# Altium PCB Placa Principal.PcbDoc
Units mil, origin at the board's own origin, x right, y up, seen from the top; angles counter-clockwise.
Board outline 3870 x 2300 mil, 2 copper layers (Top Layer, Bottom Layer); 21 components, 15 nets, 105 pads, 23 vias.
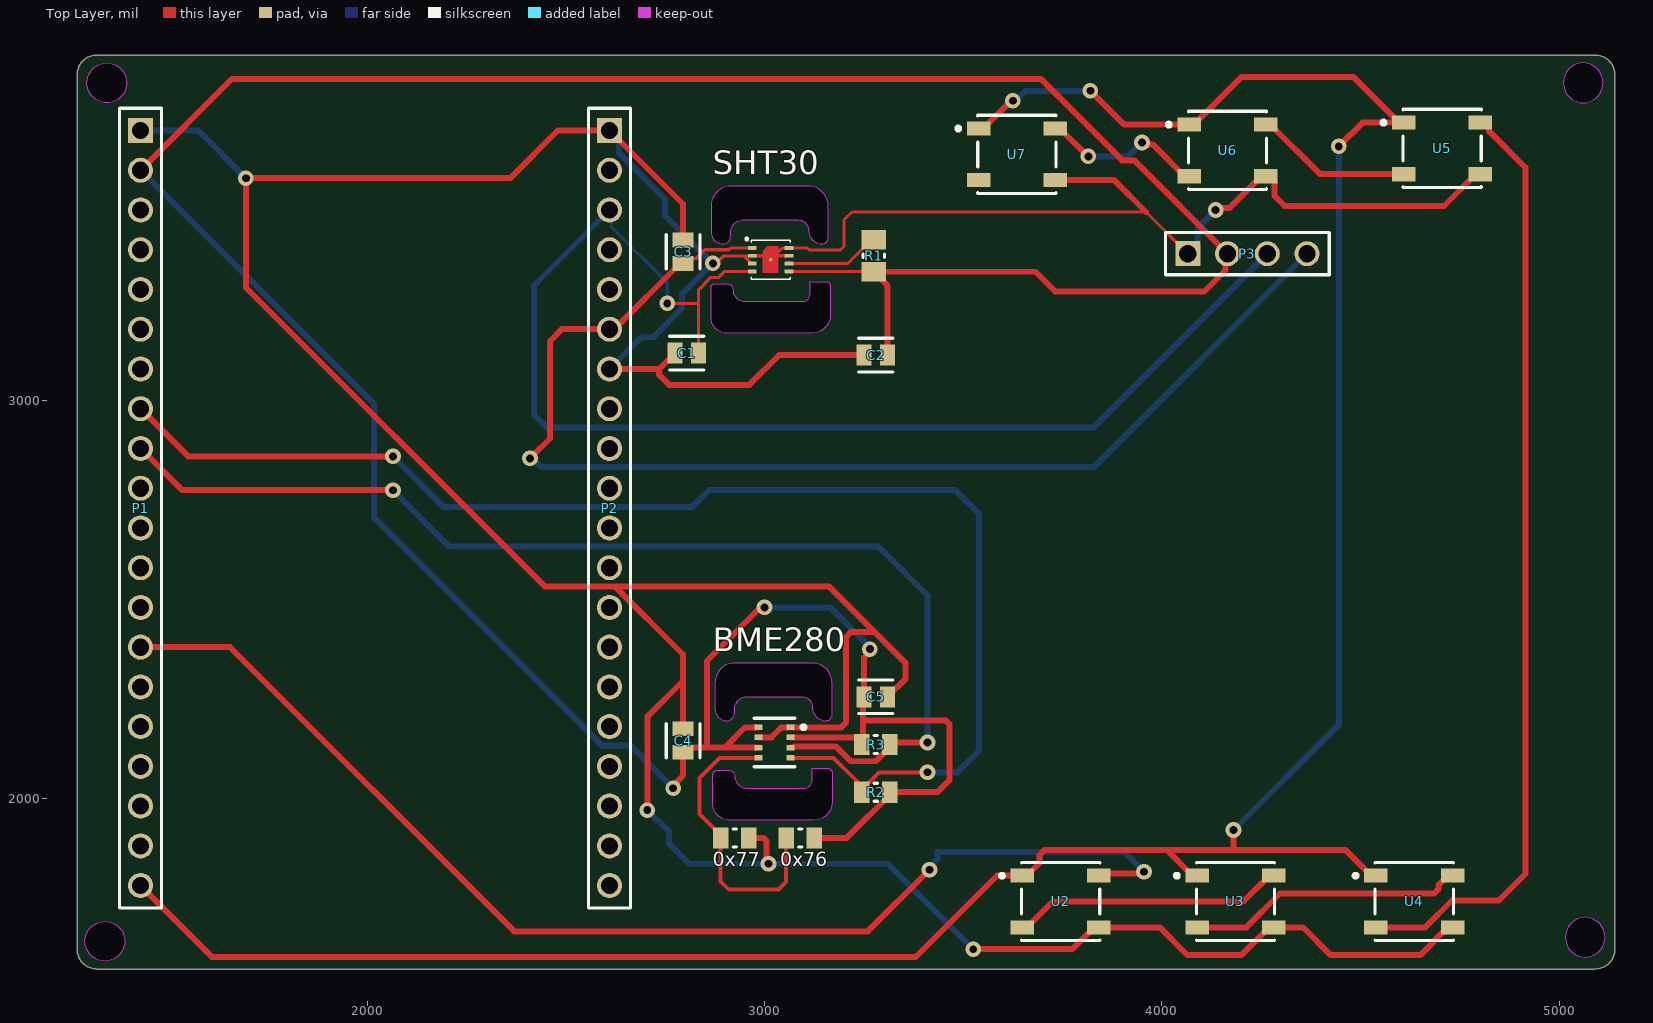
[diagram p0: Top Layer view]
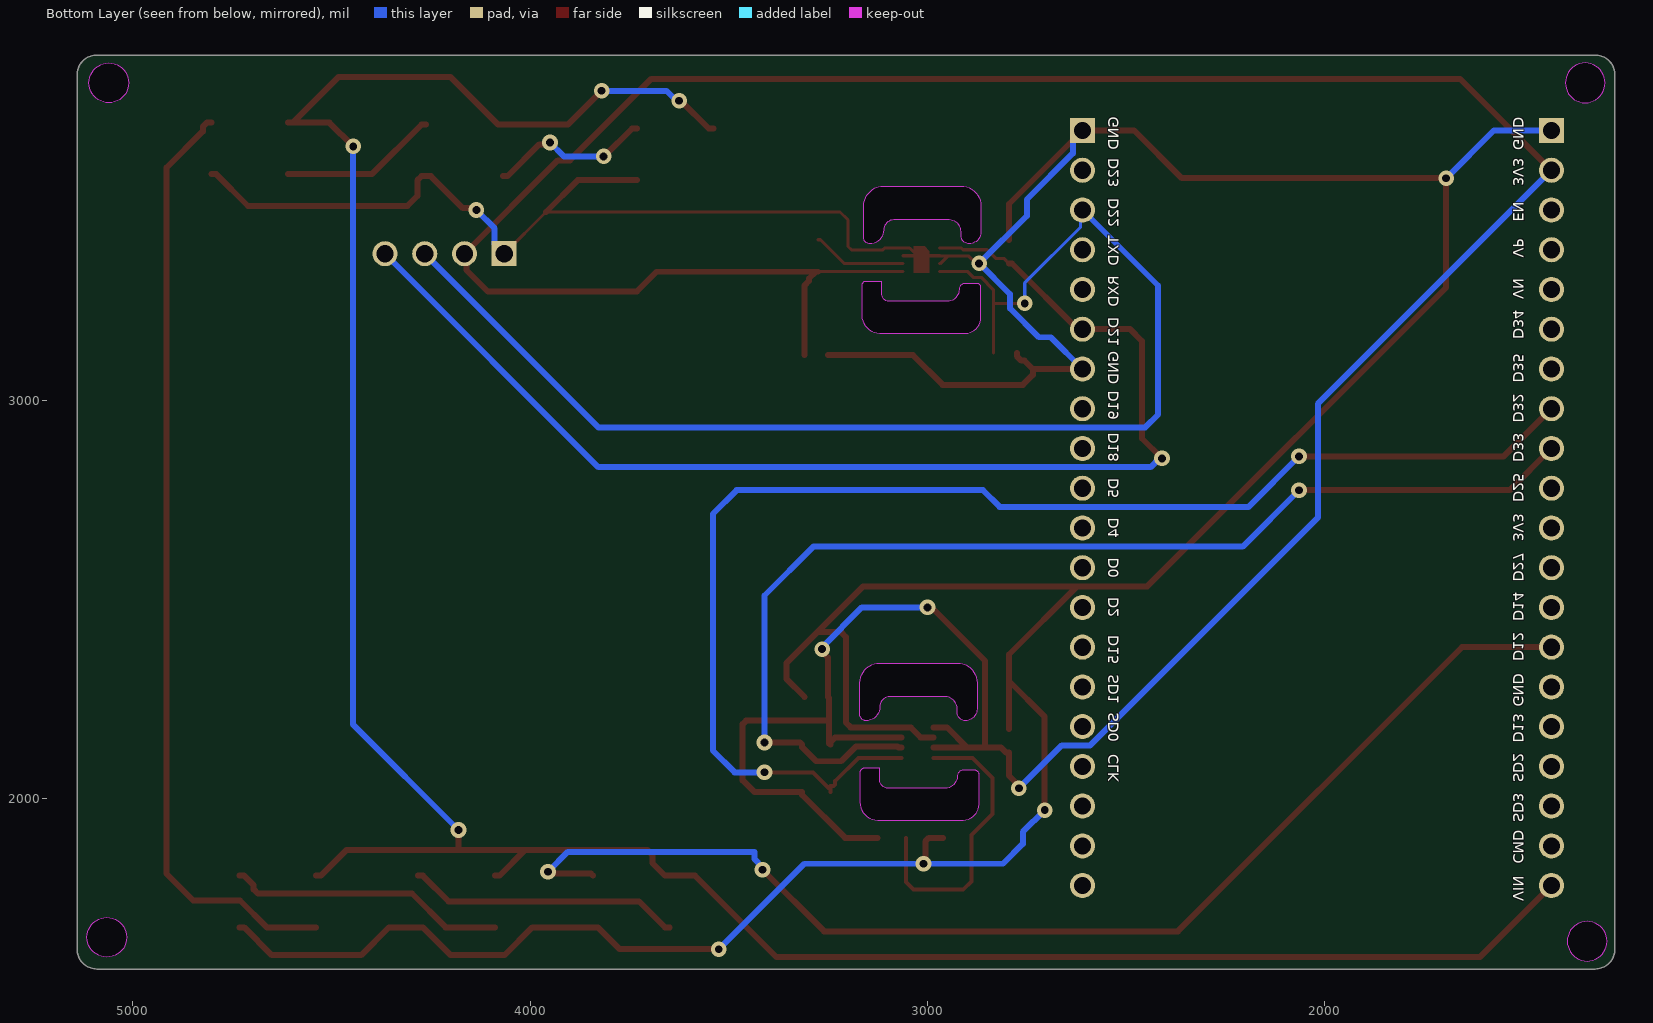
[diagram p1: Bottom Layer view, seen from below]
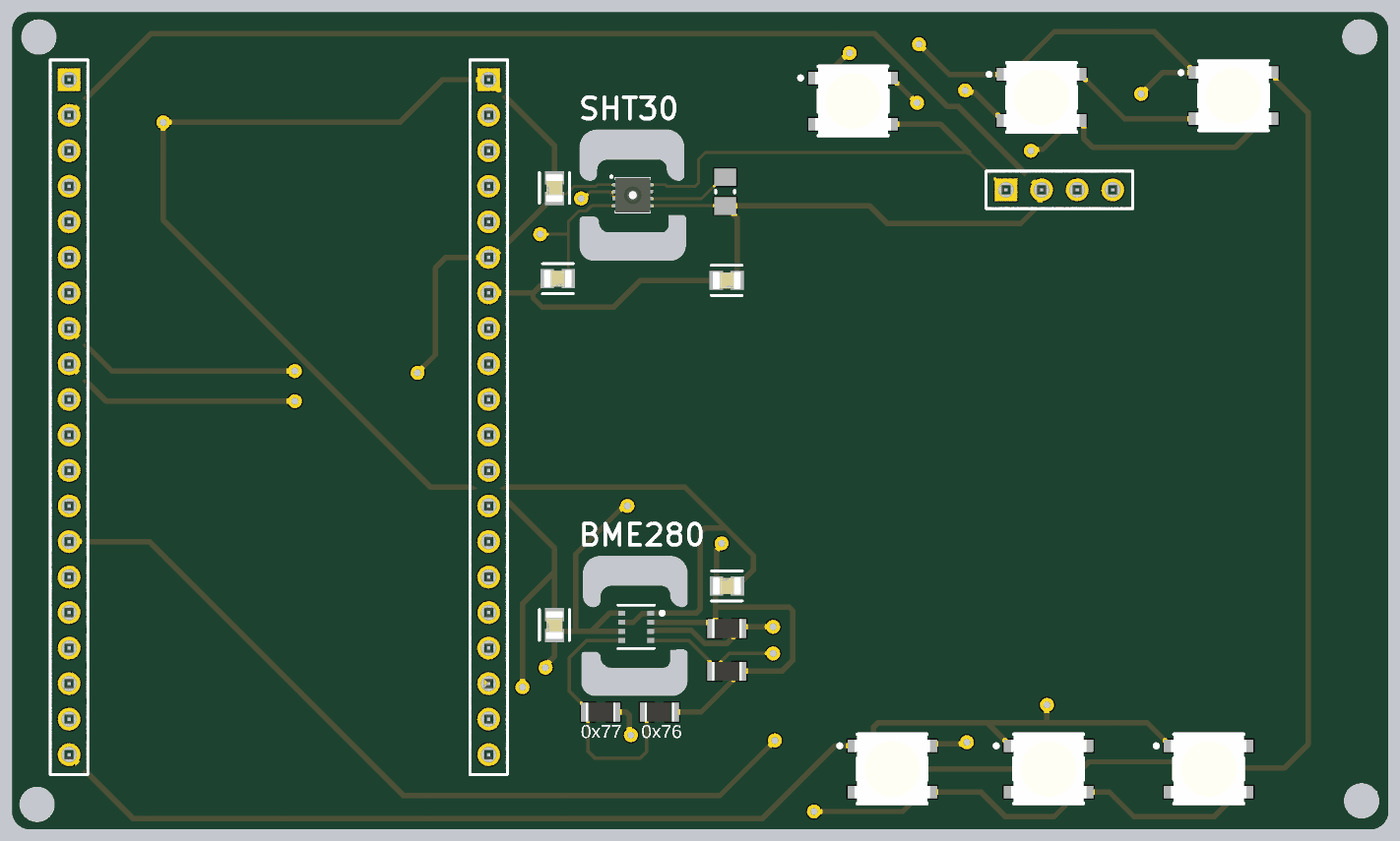
[diagram p2: 3D render of the assembled board from above, using the file's embedded part models]

## Layer stack, top to bottom
Top Solder: solder mask 0.4, Solder Resist, Dk 3.5
Top Layer: signal copper 1.4
Dielectric 1: dielectric 12.6, FR-4, Dk 4.8
Bottom Layer: signal copper 1.4
Bottom Solder: solder mask 0.4, Solder Resist, Dk 3.5

## Board outline
1270,1620 1270,3820 cw(c1320,3820) 1320,3870 5090,3870 cw(c5090,3820) 5140,3820 5140,1620 cw(c5090,1620) 5090,1570 1320,1570 cw(c1320,1620)
cut-out: 2875,2225 ccw(c2905,2225) 2905,2195 ccw(c2905,2215) 2925,2215 2925,2225 cw(c2955,2225) 2955,2255 3095,2255 cw(c3095,2230) 3120,2230 ccw(c3155,2230) 3155,2195 ccw(c3155,2210) 3170,2210 3170,2290 ccw(c3120,2290) 3120,2340 2925,2340 ccw(c2925,2290) 2875,2290
cut-out: 2870,1985 2870,2060 cw(c2880,2060) 2880,2070 2910,2070 cw(c2910,2055) 2925,2055 ccw(c2955,2055) 2955,2025 3100,2025 ccw(c3100,2045) 3120,2045 3120,2075 3160,2075 cw(c3160,2065) 3170,2065 3170,1990 cw(c3125,1990) 3125,1945 2910,1945 cw(c2910,1985)
cut-out: 1345,3750 cw(c1345,3800) 1295,3800 cw(c1345,3800) 1345,3850 cw(c1345,3800) 1395,3800 cw(c1345,3800)
cut-out: 1340,1590 cw(c1340,1640) 1290,1640 cw(c1340,1640) 1340,1690 cw(c1340,1640) 1390,1640 cw(c1340,1640)
cut-out: 5015,1650 ccw(c5065,1650) 5065,1600 ccw(c5065,1650) 5115,1650 ccw(c5065,1650) 5065,1700 ccw(c5065,1650)
cut-out: 5010,3800 ccw(c5060,3800) 5060,3750 ccw(c5060,3800) 5110,3800 ccw(c5060,3800) 5060,3850 ccw(c5060,3800)
cut-out: 2865.32,3425 ccw(c2895.32,3425) 2895.32,3395 ccw(c2895.32,3415) 2915.32,3415 2915.32,3425 cw(c2945.32,3425) 2945.32,3455 3085.32,3455 cw(c3085.32,3430) 3110.32,3430 ccw(c3145.32,3430) 3145.32,3395 ccw(c3145.32,3410) 3160.32,3410 3160.32,3490 ccw(c3110.32,3490) 3110.32,3540 2915.32,3540 ccw(c2915.32,3490) 2865.32,3490
cut-out: 2865.32,3210 2865.32,3285 cw(c2875.32,3285) 2875.32,3295 2905.32,3295 cw(c2905.32,3280) 2920.32,3280 ccw(c2950.32,3280) 2950.32,3250 3095.32,3250 ccw(c3095.32,3270) 3115.32,3270 3115.32,3300 3155.32,3300 cw(c3155.32,3290) 3165.32,3290 3165.32,3215 cw(c3120.32,3215) 3120.32,3170 2905.32,3170 cw(c2905.32,3210)

## Design rules (kind name [scope] priority, off if disabled: settings)
BoardOutlineClearance [All] p1: gap=7.87 ignorepadtopadclearanceinfootprint=FALSE except(15.75: Arc-SplitBarrior Arc-SplitContinuation Track-SplitBarrior Track-SplitContinuation SMDPad-SplitBarrior SMDPad-SplitContinuation THPad-SplitBarrior THPad-SplitContinuation Via-SplitBarrior Via-SplitContinuation Fill-SplitBarrior Fill-SplitContinuation Poly-SplitBarrior Poly-SplitContinuation Region-SplitBarrior Region-SplitContinuation Text-SplitBarrior Text-SplitContinuation)
Clearance "Clearance Bottom Layer" [OnLayer('Bottom Layer')] p1: gap=8 ignorepadtopadclearanceinfootprint=TRUE except(10: Arc-Text Track-Text SMDPad-Text THPad-Text Via-Text Fill-Text Poly-Text Region-Text Text-Text)
Clearance "Clearance Top Layer" [OnLayer('Top Layer')] p2: gap=8 ignorepadtopadclearanceinfootprint=TRUE except(10: Arc-Text Track-Text SMDPad-Text THPad-Text Via-Text Fill-Text Poly-Text Region-Text Text-Text)
Clearance [All] p3: gap=7.87 ignorepadtopadclearanceinfootprint=FALSE except(3.5: Arc-Arc Arc-Track Arc-SMDPad Track-Track Track-SMDPad SMDPad-SMDPad; 5: Arc-Via Track-Via SMDPad-Via THPad-Via Via-Via; 10: Arc-Text Track-Text SMDPad-Text THPad-Text Via-Text Fill-Text Poly-Text Region-Text Text-Text)
HoleSize [All] p1: absolutevalues=TRUE maxlimit=248.03 minlimit=7.87 maxpercent=80.000 minpercent=20.000
MinimumAnnularRing [All] p1: minimumring=3
MinimumSolderMaskSliver [All] p1: minsoldermaskwidth=3.94
PolygonConnect PolygonConnect_1 [All] p1: thpad.connectstyle=Relief thpad.reliefconductorwidth=20 thpad.reliefentries=4 thpad.polygonreliefangle="90 Angle" thpad.airgapwidth=10 smdpad.connectstyle=Relief smdpad.reliefconductorwidth=20 smdpad.reliefentries=4 smdpad.polygonreliefangle="90 Angle" smdpad.airgapwidth=10 via.connectstyle=Direct via.reliefconductorwidth=20 via.reliefentries=4 via.polygonreliefangle="90 Angle" via.airgapwidth=10
RoutingCorners [All] p1: cornerstyle=Round minsetback=100 maxsetback=100
RoutingVias [All] p1: holewidth=19.68 width=39.37 viastyle="Through Hole" minholewidth=7.87 minwidth=17.72 maxholewidth=39.37 maxwidth=78.74
SilkToSilkClearance [All] p1: silktosilkclearance=3.94
SilkToSolderMaskClearance [IsPad] p1: minsilkscreentomaskgap=3.94 clearancetoexposedcopper=TRUE
SolderMaskExpansion [All] p1: expansion=4 istentingtop=FALSE
Width [All] p1: maxlimit=100 minlimit=3.5 preferedwidth=15
25 further rules are at their usual default settings.

## Components (designator, comment, footprint, x,y, rotation, side; value= is the part's Value field where it differs from the comment)
0x76 "0x76" RESC2013X60X35NL10T20 3090,1900 r0 top (schematic designator R4)
0x77 "0x77" RESC2013X60X35NL10T20 2925,1900 r180 top (schematic designator R5)
BME280 "BME280" FP-BME280-MFG 3025,2140 r0 top (schematic designator U1)
C1 "0.1nF" FP-C0805C-DN-MFG 2804.53,3120 r180 top value="0.10 μF"
C2 "100nF" FP-C0805C-DN-MFG 3279.53,3115 r180 top value="0.10 μF"
C3 "0.1nF" FP-C0805C-DN-MFG 2795,3375 r90 top value="0.10 μF"
C4 "100nF" FP-C0805C-DN-MFG 2795,2145 r90 top value="0.10 μF"
C5 "100nF" FP-C0805C-DN-MFG 3280,2255 r0 top value="0.10 μF"
P1 "61302011121" 61302011121 1430,2730 r270 top
P2 "61302011121" 61302011121 2610,2730 r270 top
P3 "61300411121" 61300411121 4215,3370 r0 top
R1 "2K" RESC2013X50X30ML20T20 3275,3365 r90 top
R2 "10k" RESC2013X60X35NL10T20 3280,2015 r0 top
R3 "10k" RESC2013X60X35NL10T20 3280,2135 r180 top
SHT30 "SHT3x-ARx" SHT3x 3015.32,3355 r0 top (schematic designator Sen1)
U2 "1655" ADA-RGB-1655_V 3745,1740 r0 top
U3 "1655" ADA-RGB-1655_V 4185,1740 r0 top
U4 "1655" ADA-RGB-1655_V 4635,1740 r0 top
U5 "1655" ADA-RGB-1655_V 4705,3635 r0 top
U6 "1655" ADA-RGB-1655_V 4165,3630 r0 top
U7 "1655" ADA-RGB-1655_V 3635,3620 r0 top

## Footprints (in the part's own frame and the unit in brackets; to place one, negate y for a bottom-side part, rotate by r counter-clockwise, add the part's x,y. Pads: shape width x height; smd on the part's side, far side on the other; paste and mask are expansions set on the pad)
61300411121 [mm] "Pin Header, pitch 2.54 mm, THT, Vertical, single row, 4p"
  rect 1.6x1.6 hole 1.1: 1(-3.81,0)
  round 1.6 hole 1.1: 2(-1.27,0) 3(1.27,0) 4(3.81,0)
  silkscreen extent -5.23,-1.35 5.23,1.35, body extent -5.08,-1.27 5.08,1.27, height 8.57
61302011121 [mm] "Pin Header, pitch 2.54 mm, THT, Vertical, single row, 20p"
  rect 1.6x1.6 hole 1.1: 1(-24.13,0)
  round 1.6 hole 1.1: 2(-21.59,0) 3(-19.05,0) 4(-16.51,0) 5(-13.97,0) 6(-11.43,0) 7(-8.89,0) 8(-6.35,0) 9(-3.81,0) 10(-1.27,0) 11(1.27,0) 12(3.81,0) 13(6.35,0) 14(8.89,0) 15(11.43,0) 16(13.97,0) 17(16.51,0) 18(19.05,0) 19(21.59,0) 20(24.13,0)
  silkscreen extent -25.55,-1.35 25.55,1.35, body extent -25.4,-1.27 25.4,1.27, height 8.57
ADA-RGB-1655_V [mm] "SMD, 4-Leads, Body 5x5mm"
  rect 1.5x0.9 smd: 1(-2.45,1.65) 2(-2.45,-1.65) 3(2.45,-1.65) 4(2.45,1.65)
  silkscreen extent -3.87,-2.5 2.5,2.5, body extent -2.7,-2.5 2.7,2.5, height 1.68
FP-BME280-MFG [mm]
  rect 0.5x0.35 smd paste+0 mask+0: 1(1.025,0.975) 2(1.025,0.325) 3(1.025,-0.325) 4(1.025,-0.975) 5(-1.025,-0.975) 6(-1.025,-0.325) 7(-1.025,0.325) 8(-1.025,0.975)
  silkscreen extent -1.3,-1.55 1.97,1.55
FP-C0805C-DN-MFG [mm]
  rect 0.95x1.35 smd paste+0 mask+0: 1(-0.75,0) 2(0.75,0)
  silkscreen extent -1.1,-1.07 1.1,1.07, body extent -1.4,-0.85 1.4,0.85, height 0.25
RESC2013X50X30ML20T20 [mm] "Chip Resistor, 2-Leads, Body 2.00x1.25mm, IPC Low Density"
  rect 1.25x1.55 smd: 1(-1.025,0) 2(1.025,0)
  silkscreen extent -0.1,-0.67 0.1,0.67, body extent -1.1,-0.72 1.1,0.72, height 0.5
RESC2013X60X35NL10T20 [mm] "Chip Resistor, 2-Leads, Body 2.1x1.35mm, IPC Medium Density"
  rect 1x1.35 smd: 1(-0.9,0) 2(0.9,0)
  silkscreen extent -0.1,-0.58 0.1,0.58, body extent -1.05,-0.68 1.05,0.67, height 0.6
SHT3x [mm]
  rrect50% 0.55x0.25 smd paste+0 mask+0.05: 1(-1.175,0.75)
  rrect20% 0.55x0.25 smd paste+0 mask+0.05: 2(-1.175,0.25) 3(-1.175,-0.25) 4(-1.175,-0.75) 5(1.175,-0.75) 6(1.175,-0.25) 7(1.175,0.25) 8(1.175,0.75)
  round 0.2 smd mask+0.05: 9(0,0)
  Top Layer region: 0.5,-0.85 -0.5,-0.85 -0.5,0.55 -0.2,0.85 0.5,0.85
  silkscreen extent -1.55,-1.25 1.25,1.35, body extent -1.25,-1.25 1.25,1.25, height 0.9

## Part data
0x76 0x77 R2 R3: library part CMP-1659-00013-4, "Chip Resistor, 10 KOhm, +/- 1%, 0.125 W, -55 to 155 degC, 0805 (2012 Metric), RoHS, Tape and Reel", Manufacturer=Yageo, Max Operating Temperature="155 degC", Min Operating Temperature="-55 degC", Package Quantity=5000, Voltage Rating="150 V", ComponentLink1Description="Manufacturer URL", ComponentLink1URL=http://www.yageo.com/, ComponentLink2Description=Datasheet, ComponentLink2URL=http://www.yageo.com/documents/recent/PYu-RC_Group_51_RoHS_L_04.pdf, DatasheetVersion="Rev. 4, 02/2016", Height="0.5 mm", Length="2 mm", Mount="Surface Mount", Mounting Technology="Surface Mount", PackageDescription="2-Pin Surface Mounted Device, Body 2 x 1.25 mm", PackageReference=0805, Packaging="Tape and Reel", Pins=2, REACH SVHC="No SVHC", RoHSCompliant=true
BME280: library part CMP-2000-05073-3, "SENSOR PRESSURE HUMIDITY TEMP", Case/Package=LGA, Max Operating Temperature=85°C, Min Operating Temperature=-40°C, Accuracy=3%, Lead Free="Lead Free", Mount="Surface Mount", Number of Pins=8, Output Type=SPI, Packaging="Cut Tape", Response Time=1s, Sensor Type=Temperature
C1 C2 C3 C4 C5: library part CMP-2007-00279-2, "CAP CER 0.1UF 50V X7R 0805", Capacitance="0.10 μF", Manufacturer=KEMET, Manufacturer Part Number=C0805C104K5RACTU, Package=C0805C-DN, Temperature="-55°C to +125°C", Temperature Characteristic=X7R, Temperature Coefficient=30ppm/°C, Temperature Range High=+125°C, Temperature Range Low=-55°C, Tolerance=0.1, Voltage Rating="50 V", Automotive=No, Category=Cap, ComponentLink2Description=Datasheet, ComponentLink2URL=https://content.kemet.com/datasheets/KEM_C1003_C0G_SMD.pdf, Device Class L1="Passive Components", Device Class L2=Capacitors, Device Class L3="Ceramic Capacitors", Digikey Description="CAP CER 0.1UF 50V X7R 0805", Height=0.88mm, Ipc Land Pattern Name=CAPC200125X78, Lead Free=Yes, Material=Ceramic, Mouser Description="Cap Ceramic 0.1uF 50V X7R 10% SMD 2.0 x 1.2 mm 125 C Paper T/R", Octopart=https://octopart.com/c0805c104k5ractu-kemet-143926, RoHS=TRUE
P1 P2: library part CMP-1502-01102-1, "THT Vertical Pin Header WR-PHD, Pitch 2.54 mm, Single Row, 20 pins", Contact Resistance=20mOhm, Manufacturer="Wurth Elektronik", Operating Temperature=-40to105degC, Rated Current=3A, Withstanding Voltage=500VAC, Working Voltage=250VAC, Datasheet URL=https://katalog.we-online.de/em/datasheet/6130xx11121.pdf, Gender=Male, Manufacturer URL=http://www.we-online.de, Mounting Technology=THT, Orientation=Vertical, Package Reference=61302011121, Packaging=Bag, Part Number=61302011121, Pin Number=20, Pitch=2.54mm, Publisher=WurthElektronik, Row Number=Single
P3: library part CMP-1502-01064-1, "THT Vertical Pin Header WR-PHD, Pitch 2.54 mm, Single Row, 4 pins", Contact Resistance=20mOhm, Manufacturer="Wurth Elektronik", Operating Temperature=-40to105degC, Rated Current=3A, Withstanding Voltage=500VAC, Working Voltage=250VAC, Datasheet URL=https://katalog.we-online.de/em/datasheet/6130xx11121.pdf, Gender=Male, Manufacturer URL=http://www.we-online.de, Mounting Technology=THT, Orientation=Vertical, Package Reference=61300411121, Packaging=Bag, Part Number=61300411121, Pin Number=4, Pitch=2.54mm, Publisher=WurthElektronik, Row Number=Single
R1: library part CMP-2001-04896-1, Manufacturer="Vishay Dale", Part Number=CRCW08050000Z0EA
U2 U3 U4 U5 U6 U7: library part CMP-2000-05026-1, "Intelligent Control LED Integrated Light Source, 3.5 to 5.3 V, -25 to 80 degC, 4-Pin SMD, RoHS, Tape and Reel", Color=Red,Green,Blue(RGB), Manufacturer=Adafruit-Industries-LLC, Package Description="4-Pin Surface Mount Device, Body 5 x 5 mm", Category=Optoelectronics, Configuration=Discrete, Controller Type=-, Datasheet URL=http://datasheet.octopart.com/ADA1655-Adafruit-Industries-datasheet-32028139.pdf, Datasheet Version=May-13, Family=Addressable,Specialty, Interface=-, Manufacturer URL=https://www.adafruit.com/, Mounting Type=SurfaceMount, Number of LEDs=10, Package Reference=1655, Series=Neopixel, Size / Dimension=5.00mmLx5.00mmW, Utilized LED=WS2812(5050)

## Via types
v1: diameter 39.37, hole 19.68, Top Layer to Bottom Layer, 23 vias

## Nets (pads, with @x,y where several pads share a name; then routed paths per layer and width w, separated by ;. In a path a pad name is that pad's centre, name@x,y a point inside that pad or via, vN(x,y) a via of type N, cw(c..) or ccw(c..) an arc to the next point about the centre after c; other vN are vias at no path point)
3V3: 0x76.2 BME280.2 BME280.6 BME280.8 C2.1 C4.1 C5.1 P1.2 P3.2 R1.1 R2.2 R3.2 SHT30.5 | length 8906.7
  Top Layer w8: SHT30.5 3274.17,3325.47 R1.1
  Top Layer w15: P1.2 1660,3810 3695,3810 3900,3605 3930,3605 P3.2 4159.93,3364.93 4159.93,3328.71 4106.21,3275 3731.33,3275 3681.68,3324.65 R1.1@3280.91,3324.65 ; v1(2770,2025) 2770,2031.59 2795,2056.59 C4.1 2802.87,2115.47 2814.61,2127.2 2855,2127.2 ; BME280.6 2899.63,2127.2 ; BME280.8 2950.81,2178.39 2899.63,2127.2 ; v1(3000,2480) 2990,2480 2855,2345 2855,2127.2 ; BME280.2 3232.38,2152.8 3244.57,2140.61 R3.2 3247.52,2137.95 3247.52,2195 ; 0x76.2 3207.32,1900 3315.43,2008.11 R2.2 3435,2015 3465,2045 3465,2186.21 3456.21,2195 3247.52,2195 ; v1(3265,2375) 3265,2368.56 3250.47,2354.03 C5.1 3247.52,2252.05 3247.52,2195 ; R1.1 R1.1@3280.91,3324.65 ; C2.1 3309.06,3290.59 3298.01,3301.63 3298.01,3307.54 R1.1@3280.91,3324.65 ; 2855,2127.2 2899.63,2127.2
  Bottom Layer w15: P1.2 2017.86,2992.14 2017.86,2705.68 2590.53,2133 2662,2133 v1(2770,2025) ; v1(3000,2480) 3165,2480 3265,2380 v1(3265,2375)
addr: 0x76.1 0x77.2 BME280.5 | length 744.2
  Top Layer w10: BME280.5 2886.61,2101.61 2836.21,2051.21 2836.21,1960.24 2889.57,1906.89 0x77.2 2889.57,1790.43 2910,1770 3035,1770 3054.57,1789.57 0x76.1
D12: P1.14 U2.4 | length 3057.1
  Top Layer w15: P1.14 1655,2380 2370,1665 3260,1665 v1(3415,1820) ; U2.4 3846.83,1810.34 3950.34,1810.34 v1(3955,1815)
  Bottom Layer w15: v1(3415,1820) 3415,1826.59 3435,1846.59 3435,1865 3905,1865 v1(3955,1815)
D21: C3.1 P2.6 P3.4 SHT30.1 | length 3108.5
  Top Layer w8: C3.1 2807.89,3358.36 2828.36,3358.36 2850.09,3380.09 2910.61,3380.09 2915.05,3384.53 SHT30.1
  Top Layer w15: v1(2410,2855) 2460,2905 2460,3150 2490,3180 P2.6 2621.65,3180 2787.13,3345.47 C3.1
  Bottom Layer w15: v1(2410,2855) 2416.59,2855 2438.59,2833 3828,2833 P3.4
D22: C1.1 P2.3 P3.3 SHT30.4 | length 3320.8
  Top Layer w8: v1(2755,3245) 2834.06,3245 ; C1.1 2834.06,3245 ; SHT30.4 2899.55,3325.47 2884.57,3310.5 2864.75,3310.5 2834.06,3279.8 2834.06,3245
  Bottom Layer w8: P2.3 2615.01,3474.99 2615.01,3436.5 2755,3296.51 v1(2755,3245)
  Bottom Layer w15: P2.3 2420,3290 2420,2965 2452,2933 3828,2933 P3.3
D32: BME280.4 P1.8 R2.1 | length 3408.7
  Top Layer w10: BME280.4 3173.39,2101.61 3232.38,2042.62 3232.38,2034.07 3236.02,2030.43 3244.57,2030.43 R2.1 ; R2.1@3248.84,2026.16 3287.68,2065 v1(3410,2065)
  Top Layer w15: P1.8 1550,2860 v1(2065,2860)
  Bottom Layer w15: v1(2065,2860) 2192,2733 2818.3,2733 2860.29,2775 3480,2775 3540,2715 3540,2120 3485,2065 v1(3410,2065)
D33: BME280.3 P1.9 R3.1 | length 2887.8
  Top Layer w15: P1.9 1535,2775 v1(2065,2775) ; BME280.3 3065.96,2127.81 3072.95,2127.81 3074.93,2129.8 3180.2,2129.8 3217.07,2092.93 3280.25,2092.93 3315.43,2128.11 R3.1 3320.43,2140 v1(3410,2140)
  Bottom Layer w15: v1(2065,2775) 2207,2633 3287,2633 3410,2510 v1(3410,2140)
GND: 0x77.1 BME280.1 BME280.7 C1.2 C2.2 C3.2 C4.2 C5.2 P1.1 P2.1 P2.7 P3.1 SHT30.2 SHT30.3 SHT30.7 SHT30.8 SHT30.9 U2.3 U3.3 U4.3 U5.3 U6.3 U7.3 | length 12000.7
  Top Layer w8: v1(2870,3345.69) 2877.31,3345.69 2895.72,3364.09 2949.37,3364.09 ; SHT30.3 2968.31,3345.16 2949.37,3364.09 ; SHT30.7 3035,3364.84 3030.08,3369.76 ; P3.1 3960,3475 3220,3475 3200,3455 3200,3388.29 3191.21,3379.5 3112.65,3379.5 3107.62,3384.53 SHT30.8 3044.84,3384.53 3030.08,3369.76 ; 2949.37,3364.09 2968.31,3364.09 SHT30.2 3005.47,3364.84 SHT30.9 3030.08,3369.76
  Top Layer w15: P2.7 2735,3080 ; v1(2705,1970) 2705,2205 2795,2295 ; C1.2 2775,3112.13 2763.8,3100.93 2755.93,3100.93 2735,3080 ; C4.2 2795,2295 ; C3.2 2795,3495 P2.1 2480,3680 2360,3560 v1(1695,3560) 1695,3285 2447,2533 2623.46,2533 ; 0x77.1 2996.55,1900 3005.34,1891.21 3005.34,1839.66 v1(3010,1835) ; BME280.7 3016.99,2152.8 3041.97,2177.78 3064.74,2177.78 BME280.1 3193.39,2178.39 3205,2190 3205,2405 3218.55,2418.55 3276.21,2418.55 ; C2.2 3036.9,3115 2961.9,3040 2760,3040 2735,3065 2735,3080 ; C5.2 3355,2300.47 3355,2339.76 3276.21,2418.55 ; v1(3525,1620) 3774.61,1620 3829.65,1675.04 U2.3 3994.22,1675.04 4064.26,1605 4199.61,1605 4269.65,1675.04 U3.3 4354.96,1675.04 4425,1605 4649.61,1605 4719.65,1675.04 U4.3 ; U7.3 3879.96,3555.04 3960,3475 ; v1(4135,3480) 4139.66,3484.66 4169.27,3484.66 4249.65,3565.04 U6.3 4273.27,3565.04 4283.48,3554.82 4283.48,3515.3 4308.79,3490 4709.61,3490 4789.65,3570.04 U5.3 ; 2623.46,2533 2795,2361.46 2795,2295 ; 2623.46,2533 3161.76,2533 3276.21,2418.55
  Bottom Layer w15: P1.1 1575,3680 v1(1695,3560) ; P2.7 2689.8,3159.8 2719.56,3159.8 2792.45,3232.69 2792.45,3268.14 v1(2870,3345.69) 2869.31,3345.69 2749.67,3465.33 2749.67,3506.8 2634,3622.47 2634,3656 P2.1 ; v1(2705,1970) 2759.83,1915.17 2759.83,1885.17 2810,1835 v1(3010,1835) 3310,1835 v1(3525,1620) ; P3.1 4089,3394 4089,3434 v1(4135,3480)
NetR1_2: R1.2 SHT30.6 | length 238.4
  Top Layer w8: SHT30.6 3208.9,3345.16 3269.09,3405.35 R1.2
NetU2_2: U2.2 U3.4 | length 686.7
  Top Layer w15: U2.2 3660.35,1675.04 3725.31,1740 4204.69,1740 4269.65,1804.96 U3.4
NetU3_2: U3.2 U4.4 | length 702.8
  Top Layer w15: U3.2 4212.29,1675.04 4297.25,1760 4685,1760 4695.61,1770.61 4695.61,1780.92 4719.65,1804.96 U4.4
NetU4_2: U4.2 U5.4 | length 2376.3
  Top Layer w15: U4.2 4662.29,1675.04 4729.77,1742.52 4847.52,1742.52 4915,1810 4915,3586.42 4823.48,3677.93 4823.48,3689.74 4813.27,3699.96 U5.4
NetU5_2: U5.2 U6.4 | length 398.8
  Top Layer w15: U6.4 4273.27,3694.96 4398.19,3570.04 U5.2
NetU6_2: U6.2 U7.4 | length 415.8
  Top Layer w15: U7.4 3743.27,3684.96 3813.23,3615 v1(3815,3615) ; v1(3950,3650) 3954.66,3645.34 3976.43,3645.34 4056.73,3565.04 U6.2
  Bottom Layer w15: v1(3815,3615) 3915,3615 v1(3950,3650)
VBUS: P1.20 U2.1 U3.1 U4.1 U5.1 U6.1 U7.1 | length 6735.9
  Top Layer w15: P1.20 1610,1600 3380,1600 3584.96,1804.96 U2.1 3660.35,1804.96 3691.78,1836.39 3691.78,1856.78 3705,1870 4011.69,1870 ; U7.1 3550.35,3684.96 3620.39,3755 v1(3625,3755) ; v1(3820,3780) 3905.04,3694.96 U6.1 4080.35,3694.96 4200.39,3815 4481.69,3815 U5.1@4596.73,3699.96 ; U3.1 4076.73,1804.96 4011.69,1870 ; v1(4180,1920) 4180,1870 ; v1(4445,3640) 4504.96,3699.96 U5.1@4596.73,3699.96 ; U4.1 4526.73,1804.96 4461.69,1870 4180,1870 ; U5.1 U5.1@4596.73,3699.96 ; 4011.69,1870 4180,1870
  Bottom Layer w15: v1(3625,3755) 3631.59,3755 3656.59,3780 v1(3820,3780) ; v1(4180,1920) 4445,2185 v1(4445,3640)
pads on no net: P1.3 P1.4 P1.5 P1.6 P1.7 P1.10 P1.11 P1.12 P1.13 P1.15 P1.16 P1.17 P1.18 P1.19 P2.2 P2.4 P2.5 P2.8 P2.9 P2.10 P2.11 P2.12 P2.13 P2.14 P2.15 P2.16 P2.17 P2.18 P2.19 P2.20 U7.2

## Silkscreen, mask and mechanical layers (free items; w line width, h text height)
Bottom Overlay:
  text "GND" at 2510.48,3715 h45 r270
  text "GND" at 1534.52,3630 h45 r90
  text "D23" at 2510.48,3610 h45 r270
  text "3V3" at 1534.52,3540 h45 r90
  text "D22" at 2510,3510 h45 r270
  text "EN" at 1535,3450 h45 r90
  text "TXD" at 2510,3415 h45 r270
  text "VP" at 1535,3360.04 h45 r90
  text "RXD" at 2510,3315 h45 r270
  text "VN" at 1535,3255.04 h45 r90
  text "D21" at 2510,3210 h45 r270
  text "D34" at 1534.52,3155 h45 r90
  text "GND" at 2510.48,3125 h45 r270
  text "D35" at 1534.52,3045 h45 r90
  text "D19" at 2510.48,3025 h45 r270
  text "D32" at 1534.52,2945 h45 r90
  text "D18" at 2510.48,2920 h45 r270
  text "D33" at 1534.52,2845 h45 r90
  text "D5" at 2510.48,2805 h45 r270
  text "D25" at 1534.52,2745 h45 r90
  text "D4" at 2510,2705 h45 r270
  text "3V3" at 1534.52,2645 h45 r90
  text "D0" at 2510.48,2605 h45 r270
  text "D27" at 1535,2545 h45 r90
  text "D2" at 2510,2505 h45 r270
  text "D14" at 1535,2445 h45 r90
  text "D15" at 2510.48,2410 h45 r270
  text "D12" at 1535,2345 h45 r90
  text "SD1" at 2510.48,2310 h45 r270
  text "GND" at 1534.52,2230 h45 r90
  text "SD0" at 2510.48,2215 h45 r270
  text "D13" at 1534.52,2140 h45 r90
  text "CLK" at 2510.48,2110 h45 r270
  text "SD2" at 1534.52,2040 h45 r90
  text "SD3" at 1534.52,1940 h45 r90
  text "CMD" at 1534.52,1835 h45 r90
  text "VIN" at 1535,1740.04 h45 r90
Mechanical 1:
  circle w10: c5065,1650 r50
  circle w10: c1340,1640 r50
  circle w10: c5060,3800 r50
  circle w10: c1345,3800 r50
  lines w5: 2870,1985 ccw(c2910,1985) 2910,1945 3125,1945 ccw(c3125,1990) 3170,1990 3170,2065 ccw(c3160,2065) 3160,2075 3120,2075 3120,2045 cw(c3100,2045) 3100,2025 3040,2025 2955,2025 cw(c2955,2055) 2925,2055 ccw(c2910,2055) 2910,2070 2880,2070 ccw(c2880,2060) 2870,2060 2870,1985 ; 2875,2225 ccw(c2905,2225) 2905,2195 ccw(c2905,2215) 2925,2215 2925,2225 cw(c2955,2225) 2955,2255 3095,2255 cw(c3095,2230) 3120,2230 ccw(c3155,2230) 3155,2195 ccw(c3155,2210) 3170,2210 3170,2290 ccw(c3120,2290) 3120,2340 2995,2340 2925,2340 ccw(c2925,2290) 2875,2290 2875,2225
  lines w10: 1270,1620 ccw(c1320,1620) 1320,1570 3350,1570 4365,1570 5090,1570 ccw(c5090,1620) 5140,1620 5140,3820 ccw(c5090,3820) 5090,3870 4365,3870 3350,3870 1365,3870 1320,3870 ccw(c1320,3820) 1270,3820 1270,1620 ; 2865.32,3210 ccw(c2905.32,3210) 2905.32,3170 3120.32,3170 ccw(c3120.32,3215) 3165.32,3215 3165.32,3290 ccw(c3155.32,3290) 3155.32,3300 3115.32,3300 3115.32,3270 cw(c3095.32,3270) 3095.32,3250 3035.32,3250 2950.32,3250 cw(c2950.32,3280) 2920.32,3280 ccw(c2905.32,3280) 2905.32,3295 2875.32,3295 ccw(c2875.32,3285) 2865.32,3285 2865.32,3210 ; 2865.32,3425 ccw(c2895.32,3425) 2895.32,3395 ccw(c2895.32,3415) 2915.32,3415 2915.32,3425 cw(c2945.32,3425) 2945.32,3455 3085.32,3455 cw(c3085.32,3430) 3110.32,3430 ccw(c3145.32,3430) 3145.32,3395 ccw(c3145.32,3410) 3160.32,3410 3160.32,3490 ccw(c3110.32,3490) 3110.32,3540 2985.32,3540 2915.32,3540 ccw(c2915.32,3490) 2865.32,3490 2865.32,3425